# Altium PCB PCB1.pcbdoc
Units mil, origin at the board's own origin, x right, y up, seen from the top; angles counter-clockwise.
Board outline 4569.89 x 4237.55 mil, 2 copper layers (Top Layer, Bottom Layer); 116 components, 63 nets, 379 pads, 56 vias.
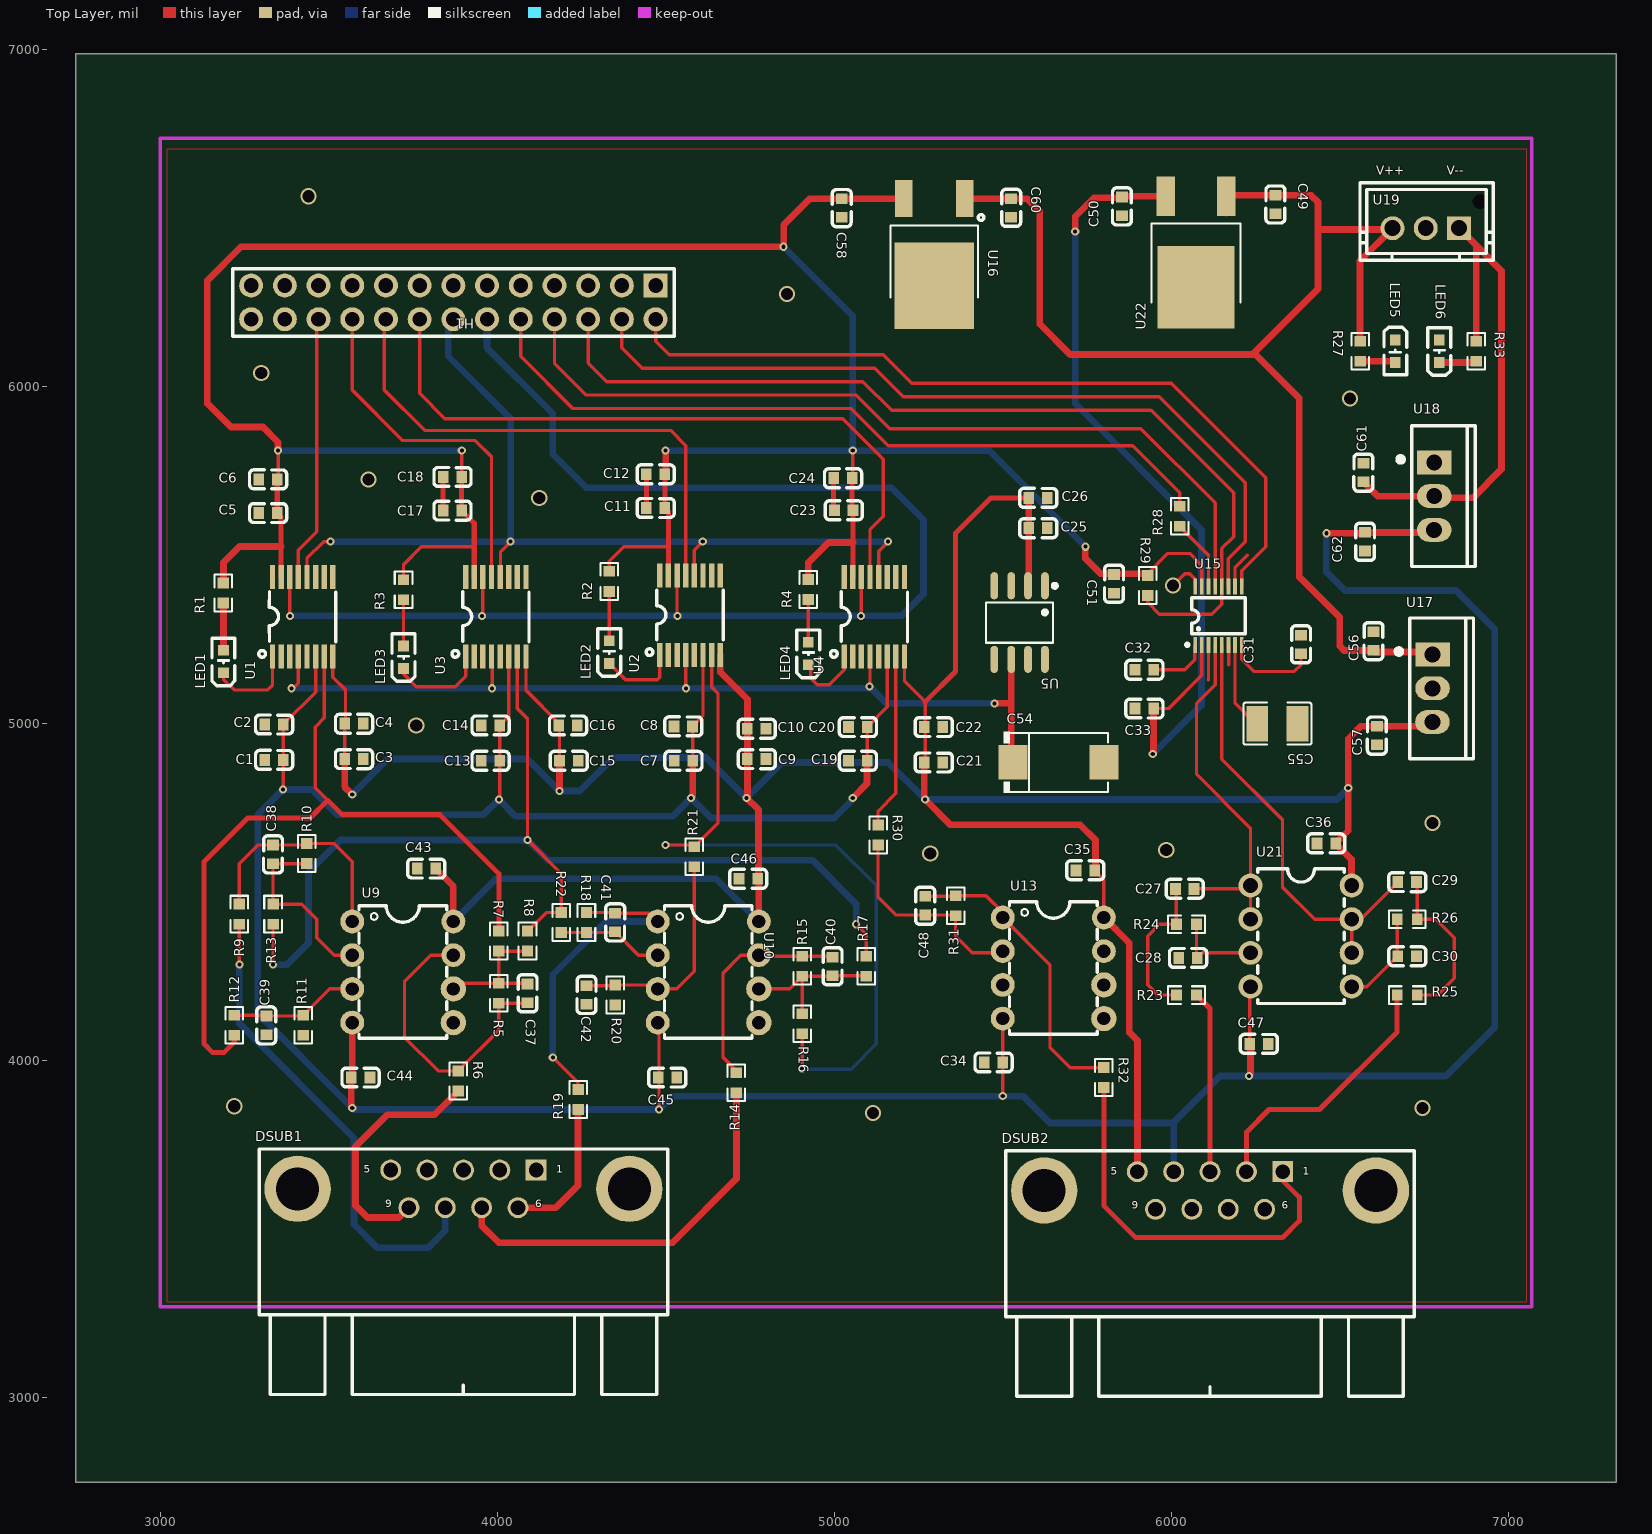
[diagram p0: Top Layer view]
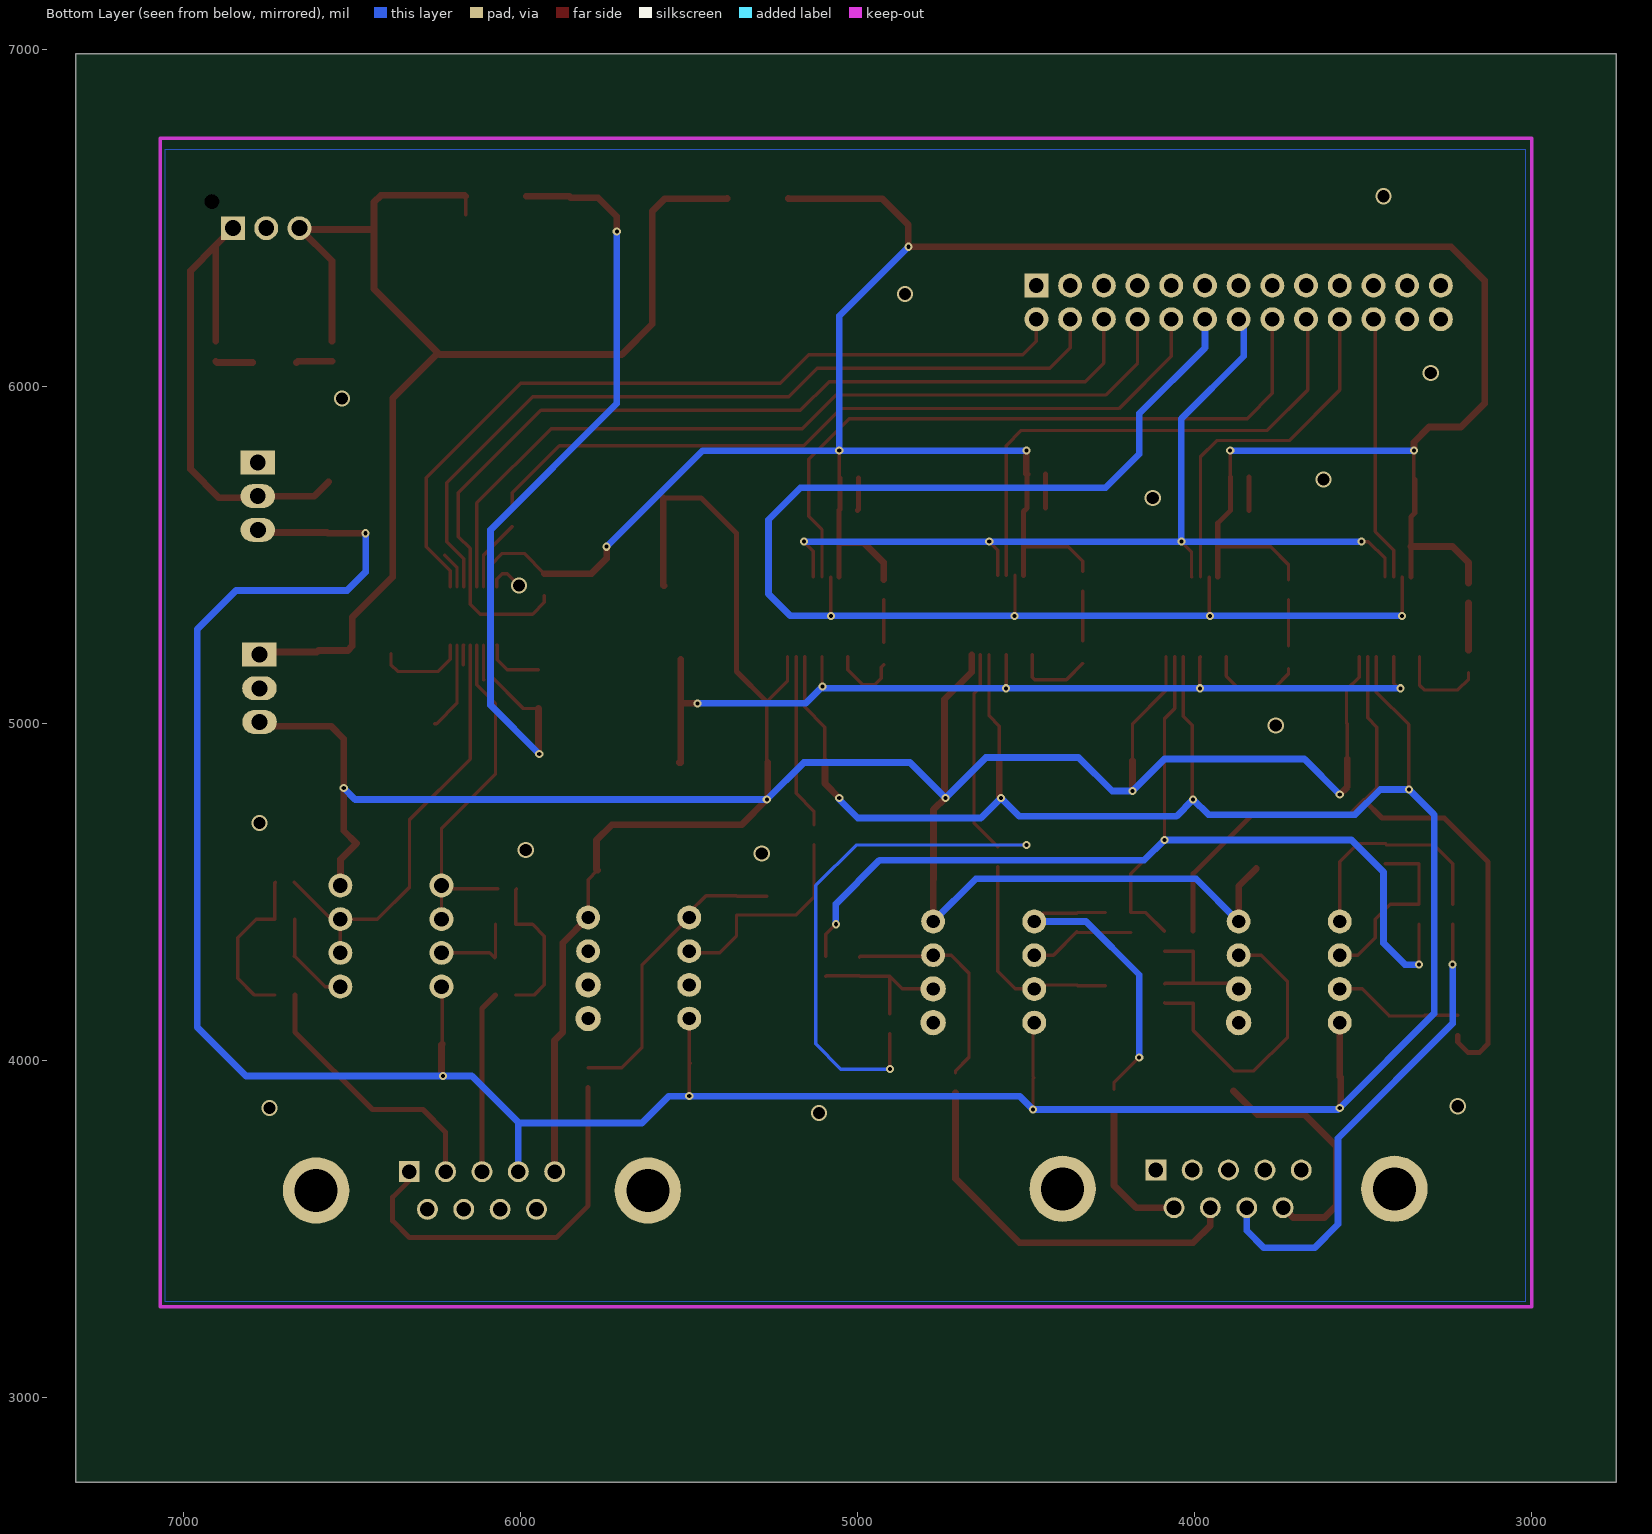
[diagram p1: Bottom Layer view, seen from below]

## Layer stack, top to bottom
Top Layer: signal copper (thickness not stored)
Dielectric: dielectric 12.6, FR-4, Dk 4.8
Bottom Layer: signal copper (thickness not stored)

## Board outline
7319.89,2750 2750,2750 2750,6987.55 7319.89,6987.55

## Components (designator, comment, footprint, x,y, rotation, side; value= is the part's Value field where it differs from the comment)
C1 "CL10B104KA8NNNC" C0603 3337.91,4892.93 r180 top
C2 "GRM188R61E106MA73D" C0603 3337.91,4997.93 r180 top
C3 "CL10B104KA8NNNC" C0603 3575,4895.24 r180 top
C4 "GRM188R61E106MA73D" C0603 3575,5000.24 r180 top
C5 "CL10B104KA8NNNC" C0603 3320,5625.24 r180 top
C6 "GRM188R61E106MA73D" C0603 3320,5725.24 r180 top
C7 "CL10B104KA8NNNC" C0603 4552.44,4890.24 r180 top
C8 "GRM188R61E106MA73D" C0603 4552.14,4992.37 r180 top
C9 "CL10B104KA8NNNC" C0603 4770,4895.24 r180 top
C10 "GRM188R61E106MA73D" C0603 4770,4985.24 r180 top
C11 "CL10B104KA8NNNC" C0603 4470,5640.24 r180 top
C12 "GRM188R61E106MA73D" C0603 4470,5740.24 r180 top
C13 "CL10B104KA8NNNC" C0603 3980,4890.24 r180 top
C14 "GRM188R61E106MA73D" C0603 3980,4995.24 r180 top
C15 "CL10B104KA8NNNC" C0603 4212.44,4890.24 r180 top
C16 "GRM188R61E106MA73D" C0603 4210,4995.24 r180 top
C17 "CL10B104KA8NNNC" C0603 3867.14,5632.37 r180 top
C18 "GRM188R61E106MA73D" C0603 3867.14,5732.37 r180 top
C19 "CL10B104KA8NNNC" C0603 5070,4890.24 r180 top
C20 "GRM188R61E106MA73D" C0603 5070,4990.24 r180 top
C21 "CL10B104KA8NNNC" C0603 5295,4885.24 r180 top
C22 "GRM188R61E106MA73D" C0603 5295,4990.24 r180 top
C23 "CL10B104KA8NNNC" C0603 5028.25,5633.49 r180 top
C24 "GRM188R61E106MA73D" C0603 5025.81,5728.49 r180 top
C25 "GRM188R61E106MA73D" C0603 5605,5580.24 r180 top
C26 "CL10B104KA8NNNC" C0603 5605,5670.24 r180 top
C27 "CL10B104KA8NNNC" C0603 6040,4510.24 r0 top
C28 "CL10B104KA8NNNC" C0603 6050,4305.24 r0 top
C29 "CL10B104KA8NNNC" C0603 6700,4530.24 r180 top
C30 "CL10B104KA8NNNC" C0603 6700,4310.24 r180 top
C31 "CL10B104KA8NNNC" C0603 6385,5235.24 r270 top
C32 "CL10B104KA8NNNC" C0603 5920,5160.24 r180 top
C33 "CL10B104KA8NNNC" C0603 5920,5045.24 r180 top
C34 "CL10B104KA8NNNC" C0603 5472.44,3995.24 r180 top
C35 "CL10B104KA8NNNC" C0603 5745,4565.24 r0 top
C36 "CL10B104KA8NNNC" C0603 6460,4645.24 r0 top
C37 "0603B472K500NT" C0603 4090,4200.24 r270 top
C38 "0603B472K500NT" C0603 3335,4612.68 r90 top
C39 "0603B472K500NT" C0603 3315,4105.24 r90 top
C40 "0603B472K500NT" C0603 4995,4280.24 r270 top
C41 "0603B472K500NT" C0603 4350,4410.24 r270 top
C42 "0603B472K500NT" C0603 4265,4195.24 r270 top
C43 "CL10B104KA8NNNC" C0603 3790,4570.24 r0 top
C44 "CL10B104KA8NNNC" C0603 3595,3950.24 r0 top
C45 "CL10B104KA8NNNC" C0603 4505,3950.24 r0 top
C46 "CL10B104KA8NNNC" C0603 4745,4540.24 r0 top
C47 "CL10B104KA8NNNC" C0603 6260,4050.24 r0 top
C48 "0603B472K500NT" C0603 5270,4460.24 r90 top
C49 "CAP_0603" C0603 6308.7,6540.24 r270 top
C50 "CAP_0603" C0603 5853.7,6535.24 r90 top
C51 "CL10B104KA8NNNC" C0603 5830,5415.24 r270 top
C54 "F931D107MNC" CAP-SMD_L7.3-W4.3-FD 5665,4885.24 r0 top
C55 "={Value}" C1210 6315,5000.24 r0 top
C56 "CAP_0603" C0603 6600,5245.24 r90 top
C57 "CAP_0603" C0603 6610,4965.24 r90 top
C58 "CAP_0603" C0603 5022.4,6530.24 r90 top
C60 "CAP_0603" C0603 5525,6530.24 r270 top
C61 "CAP_0603" C0603 6570,5745.24 r90 top
C62 "CAP_0603" C0603 6575,5540.24 r90 top
DSUB1 "RDED-9SE-LNA(4-40)(55)" DSUB-TH_9P-P2.74-S2.84_L18.5-W30.8-M 3900,3620.24 r0 top
DSUB2 "RDED-9SE-LNA(4-40)(55)" DSUB-TH_9P-P2.74-S2.84_L18.5-W30.8-M 6115,3615.24 r0 top
H1 "10897262" HDR-TH_26P-P2.54-V-M-R2-C13-S2.54 3870,6250.24 r180 top
LED1 "19-217/R6C-AL1M2VY/3T" LED0603-R-RD 3187.91,5184.43 r90 top
LED2 "19-217/R6C-AL1M2VY/3T" LED0603-R-RD 4332.14,5212.37 r90 top
LED3 "19-217/R6C-AL1M2VY/3T" LED0603-R-RD 3722.14,5197.37 r90 top
LED4 "19-217/R6C-AL1M2VY/3T" LED0603-R-RD 4923.25,5208.49 r90 top
LED5 "19-217/R6C-AL1M2VY/3T" LED0603-R-RD 6665,6105.24 r270 top
LED6 "19-217/R6C-AL1M2VY/3T" LED0603-R-RD 6795,6105.24 r90 top
R1 "0603WAF1002T5E" R0603 3187.91,5387.93 r270 top
R2 "0603WAF1002T5E" R0603 4332.14,5422.37 r270 top
R3 "0603WAF1002T5E" R0603 3722.14,5397.37 r270 top
R4 "0603WAF1002T5E" R0603 4923.25,5398.49 r270 top
R5 "ARG03DTC3001" R0603 4005,4200.24 r270 top
R6 "ERJU3RD2200V" R0603 3885,3940.24 r270 top
R7 "ARG03DTC3001" R0603 4005,4355.24 r270 top
R8 "ARG03DTC3001" R0603 4090,4355.24 r270 top
R9 "ERJU3RD2200V" R0603 3235,4435.24 r270 top
R10 "ARG03DTC3001" R0603 3435,4615.24 r90 top
R11 "ARG03DTC3001" R0603 3425,4105.24 r90 top
R12 "ARG03DTC3001" R0603 3220,4105.24 r90 top
R13 "ARG03DTC3001" R0603 3335,4435.24 r90 top
R14 "ERJU3RD2200V" R0603 4710,3935.24 r90 top
R15 "ARG03DTC3001" R0603 4905,4280.24 r270 top
R16 "ARG03DTC3001" R0603 4905,4110.24 r270 top
R17 "ARG03DTC3001" R0603 5095,4280.24 r90 top
R18 "ARG03DTC3001" R0603 4265,4410.24 r270 top
R19 "ERJU3RD2200V" R0603 4240,3885.24 r90 top
R20 "ARG03DTC3001" R0603 4350,4195.24 r270 top
R21 "ARG03DTC3001" R0603 4585,4605.24 r90 top
R22 "ARG03DTC3001" R0603 4190,4410.24 r90 top
R23 "470" R0603 6045,4195.24 r180 top
R24 "470" R0603 6045,4405.24 r0 top
R25 "470" R0603 6700,4195.24 r0 top
R26 "470" R0603 6700,4420.24 r180 top
R27 "0603WAF1002T5E" R0603 6560,6105.24 r270 top
R28 "Res_0603" R0603 6025,5615.58 r90 top
R29 "Res_0603" R0603 5930,5410.24 r90 top
R30 "ARG03DTC3001" R0603 5130,4670.24 r270 top
R31 "ARG03DTC3001" R0603 5360,4460.24 r90 top
R32 "ARG03DTC3001" R0603 5800,3950.24 r270 top
R33 "0603WAF1002T5E" R0603 6905,6105.24 r90 top
U1 "={Manufacturer Part}" TSSOP-16_L5.0-W4.4-P0.65-LS6.4-TL 3422.91,5317.37 r90 top
U2 "={Manufacturer Part}" TSSOP-16_L5.0-W4.4-P0.65-LS6.4-TL 4572.14,5322.37 r90 top
U3 "AD5761RBRUZ" TSSOP-16_L5.0-W4.4-P0.65-LS6.4-TL 3995.98,5317.37 r90 top
U4 "={Manufacturer Part}" TSSOP-16_L5.0-W4.4-P0.65-LS6.4-TL 5119.06,5317.37 r90 top
U5 "={Manufacturer Part}" SOIC-8_L4.9-W3.9-P1.27-LS6.0-BL 5550,5300.24 r180 top
U9 "OPA2227P" PDIP-8_L9.6-W6.4-P2.54-LS7.6-BL 3720,4263.34 r270 top
U10 "OPA2227P" PDIP-8_L9.6-W6.4-P2.54-LS7.6-BL 4626.31,4263.34 r270 top
U13 "OPA2227P" PDIP-8_L9.6-W6.4-P2.54-LS7.6-BL 5650,4275.24 r270 top
U15 "LTC2326HMS-16#PBF" MSOP-16_L4.0-W3.0-P0.50-LS4.9-BL 6140,5320.24 r0 top
U16 "BD733L5FP-CE2" TO-252-3L_L6.6-W6.1-P4.60-LS9.5-BR-CW 5296.7,6429.15 r90 top
U17 "SL7815" TO-220-3_L10.0-W4.5-P2.54-L 6775,5105.24 r270 top
U18 "L7915CV" TO-220-3_L10.0-W4.5-P2.54-L 6780,5675.24 r270 top
U19 "B3B-XH-AM(LF)(SN)" CONN-TH_3P-P2.50_B3B-XH-AM-LF-SN 6755,6470.24 r180 top
U21 "LT1469IN8#PBF" PDIP-8_L10.2-W6.5-P2.54-LS7.6-BL 6385,4370.24 r270 top
U22 "MC7805CDTG" DPAK_L6.6-W6.2-P2.29-LS9.7-BR 6073.5,6430.24 r90 top

## Footprints (in the part's own frame and the unit in brackets; to place one, negate y for a bottom-side part, rotate by r counter-clockwise, add the part's x,y. Pads: shape width x height; smd on the part's side, far side on the other; paste and mask are expansions set on the pad)
C0603 [mm]
  rect 0.8x0.9 smd paste+0 mask+0.051: 1(-0.7,0) 2(0.7,0)
  silkscreen extent -1.41,-0.71 1.39,0.72
C1210 [mm]
  rect 1.635x2.7 smd paste-100 mask+0.051: 1(-1.517,0) 2(1.517,0)
  silkscreen extent -2.56,-1.58 2.56,1.58
CAP-SMD_L7.3-W4.3-FD [mm]
  rect 2.185x2.592 smd paste+0 mask+0.051: 1(-3.437,0) 2(3.437,0)
  silkscreen extent -4.11,-2.3 3.72,2.3
CONN-TH_3P-P2.50_B3B-XH-AM-LF-SN [mm]
  rect 1.8x1.8 hole 1.2 paste+0 mask+0.051: 1(-2.5,0)
  round 1.8 hole 1.2 paste+0 mask+0.051: 2(0,0) 3(2.5,0)
  Multi-Layer board cut-out: -4.65,-2 -4.596,-2.239 -4.443,-2.43 -4.222,-2.536 -3.978,-2.536 -3.757,-2.43 -3.604,-2.239 -3.55,-2 -3.55,-2 -3.604,-1.761 -3.757,-1.57 -3.978,-1.464 -4.222,-1.464 -4.443,-1.57 -4.596,-1.761 -4.65,-2
  silkscreen extent -5.08,-3.43 4.95,2.41
DPAK_L6.6-W6.2-P2.29-LS9.7-BR [mm]
  rect 3x1.4 smd paste+0 mask+0.051: 1(3.424,-2.286) 3(3.424,2.286)
  rect 6.2x5.8 smd paste+0 mask+0.051: 2(-3.424,0)
  silkscreen extent -4.58,-3.35 1.38,3.35
DSUB-TH_9P-P2.74-S2.84_L18.5-W30.8-M [mil]
  round 196.85 hole 127.95 paste+0 mask+2: 0(-492.13,0) 0(492.12,0)
  rect 62x62 hole 43.31 paste+0 mask+2: 1(215.74,55.9)
  round 62 hole 43.31 paste+0 mask+2: 2(107.87,55.92) 3(0.01,55.92) 4(-107.88,55.92) 5(-215.74,55.92) 6(161.82,-55.91) 7(53.93,-55.91) 8(-53.94,-55.91) 9(-161.82,-55.91)
  silkscreen extent -606,-610 606,118
HDR-TH_26P-P2.54-V-M-R2-C13-S2.54 [mm]
  rect 1.8x1.8 hole 1.1 paste+0 mask+0.051: 1(-15.24,-1.27)
  round 1.8 hole 1.1 paste+0 mask+0.051: 2(-15.24,1.27) 3(-12.7,-1.27) 4(-12.7,1.27) 5(-10.16,-1.27) 6(-10.16,1.27) 7(-7.62,-1.27) 8(-7.62,1.27) 9(-5.08,-1.27) 10(-5.08,1.27) 11(-2.54,-1.27) 12(-2.54,1.27) 13(0,-1.27) 14(0,1.27) 15(2.54,-1.27) 16(2.54,1.27) 17(5.08,-1.27) 18(5.08,1.27) 19(7.62,-1.27) 20(7.62,1.27) 21(10.16,-1.27) 22(10.16,1.27) 23(12.7,-1.27) 24(12.7,1.27) 25(15.24,-1.27) 26(15.24,1.27)
  silkscreen extent -16.64,-2.54 16.64,2.54
LED0603-R-RD [mm]
  rect 0.8x0.8 smd paste+0 mask+0.051: 1(0.851,0) 2(-0.851,0)
  silkscreen extent -1.82,-0.86 1.77,0.86
MSOP-16_L4.0-W3.0-P0.50-LS4.9-BL [mil]
  rect 11.02x47.24 smd paste+0 mask+2: 1(-68.9,-86.5) 2(-49.21,-86.5) 3(-29.53,-86.5) 4(-9.84,-86.5) 5(9.84,-86.5) 6(29.53,-86.5) 7(49.21,-86.5) 8(68.9,-86.5) 9(68.9,86.5) 10(49.21,86.5) 11(29.53,86.5) 12(9.84,86.5) 13(-9.84,86.5) 14(-29.53,86.5) 15(-49.21,86.5) 16(-68.9,86.5)
  silkscreen extent -97,-91 79,53
PDIP-8_L9.6-W6.4-P2.54-LS7.6-BL [mm]
  round 1.8 hole 1 paste+0 mask+0.051: 1(-3.81,-3.81) 2(-1.27,-3.81) 3(1.27,-3.81) 4(3.81,-3.81) 7(-1.27,3.81) 8(-3.81,3.81)
  round 1.905 hole 1 paste+0 mask+0.051: 5(3.81,3.81) 6(1.27,3.81)
  silkscreen extent -5,-3.3 5,3.3
PDIP-8_L10.2-W6.5-P2.54-LS7.6-BL [mm]
  round 1.8 hole 1.1 paste+0 mask+0.051: 1(-3.81,-3.81) 2(-1.27,-3.81) 3(1.27,-3.81) 4(3.81,-3.81) 5(3.81,3.81) 6(1.27,3.81) 7(-1.27,3.81) 8(-3.81,3.81)
  silkscreen extent -5.08,-3.25 5.08,3.25
R0603 [mil]
  rect 31.8x34 smd paste-3937.01 mask+2: 1(-29.7,0) 2(29.7,0)
  silkscreen extent -55,-26 55,26
SOIC-8_L4.9-W3.9-P1.27-LS6.0-BL [mm]
  oval 0.588x2.045 smd paste+0 mask+0.051: 1(-1.905,-2.772) 2(-0.635,-2.772) 3(0.635,-2.772) 4(1.905,-2.772) 5(1.905,2.772) 6(0.635,2.772) 7(-0.635,2.772) 8(-1.905,2.772)
  silkscreen extent -2.8,-2.92 2.53,1.52
TO-220-3_L10.0-W4.5-P2.54-L [mm]
  rect 1.8x2.6 hole 1.2 paste+0 mask+0.051: 1(-2.54,0.005)
  oval 1.8x2.6 hole 1.2 paste+0 mask+0.051: 2(0,0.005)
  oval 1.8x2.6 hole 1.2 copper offset 0,0 paste+0 mask+0.051: 3(2.54,-0.005)
  silkscreen extent -5.3,-2.73 5.3,3.09
TO-252-3L_L6.6-W6.1-P4.60-LS9.5-BR-CW [mm]
  rect 2.8x1.3 smd paste+0 mask+0.051: 1(3.292,-2.3) 3(3.292,2.3)
  rect 6.5x6 smd paste+0 mask+0.051: 2(-3.292,0)
  silkscreen extent -4.17,-3.74 2.06,3.3
TSSOP-16_L5.0-W4.4-P0.65-LS6.4-TL [mil]
  rect 71x16 smd paste+0 mask+2: 1(-118.11,89.57) 2(-118.11,63.97) 3(-118.11,38.38) 4(-118.11,12.79) 5(-118.11,-12.8) 6(-118.11,-38.39) 7(-118.11,-63.98) 8(-118.11,-89.57) 9(118.11,-89.57) 10(118.11,-63.98) 11(118.11,-38.39) 12(118.11,-12.8) 13(118.11,12.79) 14(118.11,38.38) 15(118.11,63.97) 16(118.11,89.57)
  silkscreen extent -120,-98 74,130

## Via types
v1: diameter 24, hole 12, Top Layer to Bottom Layer, 27 vias
v2: diameter 24.02, hole 12.01, Top Layer to Bottom Layer, 15 vias
v3: diameter 48, hole 36, Top Layer to Bottom Layer, 14 vias

## Nets (pads, with @x,y where several pads share a name; then routed paths per layer and width w, separated by ;. In a path a pad name is that pad's centre, name@x,y a point inside that pad or via, vN(x,y) a via of type N, cw(c..) or ccw(c..) an arc to the next point about the centre after c; other vN are vias at no path point)
3.3V: C5.1 C6.1 C11.1 C12.1 C17.1 C18.1 C23.1 C24.1 C51.1 C58.2 R1.1 R2.1 R3.1 R4.1 R29.2 U1.15 U2.15 U3.15 U4.15 U15.15 U16.3 | length 8441.1
  Top Layer w10: C6.1 3350,5727.68 v1(3350,5810.24) ; R3.1 3722.14,5472.37 3775,5525.24 3931.66,5525.24 3931.98,5524.91 ; C18.1 3895,5732.68 v1(3895,5810.24) ; R2.1 4332.14,5482.37 4375,5525.24 4507.24,5525.24 4508.14,5526.14 ; C24.1 5055,5730.12 v1(5055,5810.24) ; R29.2 5930,5445.24 5990,5505.24 6055,5505.24 6090.79,5469.45 U15.15
  Top Layer w15: C6.1 C5.1 3358.91,5613.89 3358.91,5526.12 U1.15 ; C18.1 C17.1 3931.98,5595.09 3931.98,5524.91 U3.15 ; C12.1 C11.1 4508.14,5629.66 4508.14,5526.14 U2.15@4508.14,5440.47 ; C24.1 5053.37,5635.93 C23.1 5055.81,5537.94 5055.81,5436.22 U4.15
  Top Layer w20: R1.1 3187.91,5478.14 3235.88,5526.12 3358.91,5526.12 ; v1(3350,5810.24) 3350,5835.24 3305,5880.24 3210,5880.24 3140,5950.24 3140,6315.24 3240,6415.24 v1(4850,6415.24) 4850,6480.24 4927.56,6557.8 C58.2 5205.19,6557.8 U16.3 ; C12.1 4500,5742.68 v1(4500,5810.24) ; R4.1 4923.25,5478.49 4982.7,5537.94 5055.81,5537.94 ; v1(5745,5525.24) 5745,5490.24 5790,5445.24 R29.2@5930,5445.24
  Bottom Layer w20: v1(3350,5810.24) v1(3895,5810.24) ; v1(4500,5810.24) v1(5055,5810.24) ; v1(4850,6415.24) 5055,6210.24 v1(5055,5810.24) ; v1(5745,5525.24) 5460,5810.24 v1(5055,5810.24)
5V: C33.1 C50.2 U15.2 U22.3 | length 2514.1
  Top Layer w10: C33.1 5992.56,5045.24 6090.79,5143.47 U15.2
  Top Layer w20: v1(5715,6460.24) 5715,6505.24 5770,6560.24 5851.14,6560.24 C50.2 5856.14,6565.24 5983.32,6565.24 U22.3 ; v1(5945,4910.24) 5947.56,4912.8 C33.1
  Bottom Layer w20: v1(5715,6460.24) 5715,5950.24 6090,5575.24 6090,5055.24 v1(5945,4910.24)
$1N8441: LED2.2 U2.1 | length 240.2
  Top Layer w10: LED2.2 4380.77,5130.24 4475,5130.24 4482.54,5137.77 U2.1@4482.54,5204.27
$1N8442: LED2.1 R2.2 | length 146.8
  Top Layer w10: LED2.1 R2.2
$1N8455: LED1.2 U1.1 | length 268.5
  Top Layer w10: LED1.2 3187.91,5132.33 3220,5100.24 3320,5100.24 3333.31,5113.54 U1.1
$1N8456: LED1.1 R1.2 | length 140.3
  Top Layer w20: LED1.1 R1.2
$1N8468: LED4.2 U4.1 | length 208.3
  Top Layer w10: LED4.2 4930,5168.24 4930,5135.24 4950,5115.24 4985,5115.24 5029.46,5159.7 U4.1
$1N8469: LED4.1 R4.2 | length 126.8
  Top Layer w10: LED4.1 R4.2
$1N8482: LED3.2 U3.1 | length 286.4
  Top Layer w10: LED3.2 3722.14,5148.1 3760,5110.24 3875,5110.24 3906.38,5141.62 U3.1
$1N8483: LED3.1 R3.2 | length 136.8
  Top Layer w10: LED3.1 R3.2
$1N8501: C37.2 R5.2 R6.1 U9.7 | length 880.1
  Top Layer w10: U9.7 3803.1,4313.34 3725,4235.24 3725,4070.24 3825.3,3969.94 R6.1 4005,4089.94 R5.2 4087.86,4170.54 C37.2
$1N8502: C37.1 R5.1 R7.2 R8.2 U9.6 | length 408.6
  Top Layer w10: U9.6 3886.9,4230.24 4004.7,4230.24 R5.1 ; C37.1 4087.86,4229.94 R5.1 ; R8.2 R7.2 R5.1
$1N8511: C40.1 R14.2 R15.1 U10.7 | length 661.2
  Top Layer w10: R14.2 4710,3970.54 4670,4010.54 4670,4260.24 4723.1,4313.34 U10.7 4779.71,4309.94 R15.1 4992.86,4309.94 C40.1
$1N8512: C40.2 R15.2 R16.1 R17.1 U10.6 | length 446.5
  Top Layer w10: U10.6 4867.8,4213.34 R15.2 ; R16.1 R15.2 ; R17.1 5092.86,4252.68 C40.2 4992.86,4250.54 R15.2
$1N8517: C41.1 R18.1 R19.2 U10.1 | length 970.5
  Top Layer w10: v2(4165,4010.24) 4240,3935.24 R19.2 ; R18.1 4347.86,4439.94 C41.1 4451.85,4437.8 U10.1
  Bottom Layer w20: v2(4165,4010.24) 4165,4255.24 4323.1,4413.34 U10.1
$1N8518: C41.2 R18.2 R22.1 U10.2 | length 317.2
  Top Layer w10: R22.1 R18.2 4350,4380.54 C41.2 4419.34,4313.34 U10.2
$1N8520: C42.1 R20.1 R21.1 U10.3 | length 657.5
  Top Layer w10: C42.1 4347.86,4222.8 R20.1 4464.71,4224.94 U10.3 4533.1,4213.34 4585,4265.24 R21.1
$1N8548: C38.1 R10.1 R13.2 U9.2 | length 550.4
  Top Layer w10: R10.1 3434.58,4585.12 C38.1 R13.2 3420.3,4464.94 3465,4420.24 3465,4365.24 3516.9,4313.34 U9.2
$1N8549: C38.2 R9.1 R10.2 U9.1 | length 679.6
  Top Layer w10: R9.1 3235,4585.24 3290,4640.24 C38.2 3430.3,4640.24 R10.2 3515.3,4644.94 3570,4590.24 U9.1
$1N8550: C39.2 R11.2 R12.2 U9.3 | length 389.9
  Top Layer w10: R12.2 3318.54,4134.94 C39.2@3320.68,4132.8 ; C39.2 C39.2@3320.68,4132.8 ; U9.3 3503.4,4213.34 R11.2 3422.86,4132.8 C39.2@3320.68,4132.8
$1N30800: C48.1 R30.2 R31.1 U13.2 | length 631
  Top Layer w10: R30.2 5130,4485.24 5182.56,4432.68 C48.1 5357.86,4432.68 R31.1 5360,4370.24 5410,4320.24 5495,4320.24 U13.2
$1N31013: C48.2 R31.2 R32.1 U13.1 | length 894.4
  Top Layer w10: C48.2 5357.86,4487.8 R31.2 5450.3,4489.94 5500,4440.24 U13.1 5640,4285.24 5640,4040.24 5700.3,3979.94 R32.1
$2N10171: C27.1 R23.2 R24.1 | length 448.7
  Top Layer w10: C27.1 6015.3,4507.38 R24.1 5965,4405.24 5930,4370.24 5930,4225.24 5960,4195.24 R23.2
$2N10177: C27.2 U15.4 U21.1 U21.2 | length 1074.2
  Top Layer w10: C27.2 6225,4510.24 U21.1 ; U15.4 6130.16,5115.4 6075,5060.24 6075,4850.24 6235,4690.24 U21.1 ; U21.2 U21.1
$2N10196: C28.2 R24.2 U21.3 | length 264.8
  Top Layer w10: R24.2 6074.7,4308.1 C28.2 6092.56,4320.24 U21.3
$2N10488: C29.1 R25.2 R26.1 | length 495
  Top Layer w10: C29.1 6729.7,4528.1 R26.1 6785,4420.24 6840,4365.24 6840,4245.24 6790,4195.24 R25.2
$2N10490: C30.2 R26.2 U21.5 | length 285.4
  Top Layer w10: U21.5 6580,4220.24 6670.3,4310.54 C30.2@6670.3,4312.38 ; R26.2 C30.2@6670.3,4312.38 ; C30.2 C30.2@6670.3,4312.38
$2N12917: C55.1 U15.7 | length 264.1
  Top Layer w10: U15.7 6189.21,5060.77 6249.74,5000.24 C55.1
$2N12918: C31.2 U15.8 | length 274.2
  Top Layer w10: U15.8 6208.9,5191.34 6245,5155.24 6365,5155.24 6385,5175.24 C31.2
$2N13335: C29.2 U15.5 U21.6 U21.7 | length 1320.5
  Top Layer w10: U15.5 6149.84,4895.4 6330,4715.24 6330,4515.24 6425,4420.24 U21.7 ; U21.6 U21.7 ; C29.2 6562.44,4420.24 U21.7
$2N14080: C32.1 U15.1 | length 178.8
  Top Layer w10: C32.1 6040,5160.24 6070,5190.24 6070,5232.64 U15.1
$2N15362: R28.1 U15.14 | length 213.9
  Top Layer w10: R28.1@6025,5585.24 6110.47,5499.77 U15.14
$3N8511: LED5.1 R27.2 | length 106.6
  Top Layer w20: R27.2 6661.2,6075.54 LED5.1
$3N8729: LED6.2 R33.1 | length 111.6
  Top Layer w20: LED6.2 6901.2,6071.74 R33.1
+15V: C3.2 C4.2 C9.2 C10.2 C15.2 C16.2 C21.2 C22.2 C25.2 C26.2 C35.2 C36.2 C43.2 C46.2 C57.2 DSUB2.5 U1.8 U2.8 U3.8 U4.8 U5.2 U9.8 U10.8 U13.8 U17.3 U21.8 | length 9979.4
  Top Layer w10: U1.8 3512.51,5137.73 3550,5100.24 3550,5002.8 C4.2 C3.2 ; U3.8 4085.58,5099.65 4184.88,5000.36 C15.2 ; U4.8@5208.66,5199.27 5208.66,5126.58 5270,5065.24 5270,4887.8 C21.2 ; C35.2 5800,4537.8 U13.8
  Top Layer w15: 5270,5065.24 5360,5155.24 5360,5565.24 5465,5670.24 C26.2
  Top Layer w20: C3.2 3547.44,4812.8 v1(3570,4790.24) ; C43.2 3870,4517.8 U9.8 ; C15.2 4184.88,4800.36 v1(4185,4800.24) ; U2.8 4661.74,5153.5 4742.44,5072.8 C10.2 C9.2 4742.44,4782.68 v1(4740,4780.24) 4775,4745.24 4775,4537.8 4776.31,4536.48 U10.8 ; v1@5267.44,4777.8 C21.2 ; v1(5270,4775.24) 5345,4700.24 5730,4700.24 5775,4655.24 5775,4567.68 C35.2 ; U5.2@5575,5409.34 5577.44,5411.78 C25.2 C26.2 ; U13.8 5875,4350.24 5875,4085.24 5900,4060.24 5900,3671.89 DSUB2.5@5899.25,3671.15 ; U21.8 6535,4597.8 C36.2 6525,4682.68 v1(6525,4809.14) 6525,4955.24 6562.56,4992.8 C57.2 6762.37,4992.8 U17.3
  Bottom Layer w20: v1(3570,4790.24) 3675,4895.24 4090,4895.24 v1(4185,4800.24) 4245,4800.24 4345,4900.24 4620,4900.24 v1(4740,4780.24) 4845,4885.24 5160,4885.24 v1(5270,4775.24) 6491.1,4775.24 v1(6525,4809.14) ; U9.8 3996.9,4540.24 4649.41,4540.24 U10.8
-15V: C1.1 C2.1 C7.1 C8.1 C13.1 C14.1 C19.1 C20.1 C34.1 C44.1 C45.1 C47.1 C62.2 DSUB2.4 U1.6 U2.6 U3.6 U4.6 U9.4 U10.4 U13.4 U18.3 U21.4 | length 11614
  Top Layer w10: v1(3365,4805.24) 3365,4892.46 C1.1 C2.1 3461.31,5093.77 U1.6 ; v1(4005,4775.24) 4007.56,4777.8 C13.1 C14.1 4034.38,5022.06 U3.6 ; U10.4 4480,4109.65 4480,3952.8 C45.1 4480,3947.68 v1(4480,3855.24) ; C7.1 4580,4992.07 C8.1 4610.54,5023.21 U2.6 ; C19.1 C20.1 5157.46,5050.14 U4.6 ; C34.1@5497.44,3992.68 C34.1 ; v1(5500,3895.24) C34.1 ; U13.4 C34.1 ; C47.1 6232.44,4217.68 U21.4
  Top Layer w20: v1(3570,3860.24) 3567.44,3862.8 C44.1 3570,3952.8 U9.4 ; v1(4575,4780.24) 4580,4785.24 C7.1 ; v1(5055,4780.24) 5097.56,4822.8 C19.1 ; v1(6230,3955.24) 6235,3960.24 6235,4047.68 C47.1 ; v1(6460,5565.24) 6572.44,5565.24 C62.2 6772.37,5567.8 U18.3
  Bottom Layer w20: v1(5055,4780.24) 5055,4775.24 5000,4720.24 4635,4720.24 v1(4575,4780.24) 4520,4725.24 4055,4725.24 v1(4005,4775.24) 3960,4730.24 3525,4730.24 3450,4805.24 v1(3365,4805.24) 3290,4730.24 3290,4140.24 v1(3570,3860.24) 3575,3855.24 v1(4480,3855.24) 4520,3895.24 v1(5500,3895.24) 5560,3895.24 5640,3815.24 6004.25,3815.24 6007.12,3812.36 ; DSUB2.4@6007.12,3671.15 6007.12,3812.36 ; v1(6460,5565.24) 6460,5450.24 6515,5395.24 6845,5395.24 6960,5280.24 6960,4100.24 6815,3955.24 v1(6230,3955.24) 6145,3955.24 6007.12,3817.36 6007.12,3812.36
ADC_BUSY: H1.4 U15.11 | length 2430.1
  Top Layer w10: H1.4 4370,6115.24 4430,6055.24 5120,6055.24 5205,5970.24 5965,5970.24 6220,5715.24 6220,5540.24 6169.53,5489.77 U15.11
ADC_CNV: H1.2 U15.9 | length 2395.7
  Top Layer w10: H1.2 4470,6135.24 4510,6095.24 5145,6095.24 5230,6010.24 6000,6010.24 6280,5730.24 6280,5525.24 6208.9,5454.14 U15.9
ADC_SCK: H1.8 U15.13 | length 2510.5
  Top Layer w10: H1.8 4170,6070.24 4265,5975.24 5065,5975.24 5165,5875.24 5910,5875.24 6130.16,5655.08 U15.13
ADC_SDI: H1.6 R29.1 U15.12 | length 2816.2
  Top Layer w10: H1.6 4270,6070.24 4325,6015.24 5085,6015.24 5170,5930.24 5940,5930.24 6185,5685.24 6185,5555.24 6149.84,5520.08 U15.12 6149.84,5355.08 6120,5325.24 5965,5325.24 5930,5360.24 R29.1@5930,5380.58
ADC_SDO: H1.10 R28.2 | length 2272.8
  Top Layer w10: H1.10 4070,6090.24 4225,5935.24 5050,5935.24 5160,5825.24 5885,5825.24 6025,5685.24 R28.2@6025,5645.24
AGND: C1.2 C2.2 C3.1 C4.1 C5.2 C6.2 C7.2 C8.2 C9.1 C10.1 C11.2 C12.2 C13.2 C14.2 C15.1 C16.1 C17.2 C18.2 C19.2 C20.2 C21.1 C22.1 C23.2 C24.2 C25.1 C26.1 C28.1 C30.1 C31.1 C32.2 C33.2 C34.2 C35.1 C36.1 C39.1 C42.2 C43.1 C44.2 C45.2 C46.1 C47.2 C49.2 C50.1 C51.2 C54.2 C55.2 C56.2 C57.1 C58.1 C60.2 C61.2 C62.1 DSUB1.1 DSUB1.2 DSUB1.3 DSUB1.4 DSUB1.5 DSUB2.6 DSUB2.7 DSUB2.8 DSUB2.9 H1.1 H1.3 H1.5 H1.7 H1.9 H1.11 H1.13 H1.15 H1.17 H1.19 H1.21 H1.23 H1.25 LED5.2 LED6.1 R11.1 R20.2 U1.5 U1.16 U2.5 U2.16 U3.5 U3.16 U4.5 U4.16 U5.4 U9.5 U10.5 U13.3 U15.3 U15.6 U15.10 U15.16 U16.2 U17.2 U18.1 U19.2 U22.2 | length 676.4
  Top Layer w10: v3(6005,5410.24) 6040,5445.24 6055,5445.24 6071.1,5429.14 U15.16 ; 6110,5130.24 6110.47,5130.71 U15.3 ; U15.6 6170,5233.27 6170,5175.24 ; U15.10 6189.21,5464.45 6225,5500.24
  Top Layer w15: C17.2 C18.2 ; C11.2 C12.2 ; C24.2 4998.25,5635.93 C23.2
  other v3: 5115,3845.24 6745,3860.24 3220,3865.24 5285,4615.24 5985,4625.24 6775,4705.24 3760,4995.24 4125,5670.24 3618.4,5725.13 6530,5965.24 3300,6040.24 4860,6275.24 3440,6565.24
BIAS: DSUB2.1 R32.2 | length 1156.7
  Top Layer w15: R32.2 5800,3570.24 5895,3475.24 6330,3475.24 6380,3525.24 6380,3595.24 6330.74,3644.49 DSUB2.1
PREAMP+: DSUB2.3 R23.1 | length 541
  Top Layer w15: R23.1 6075,4195.24 6115,4155.24 DSUB2.3
PREAMP-: DSUB2.2 R25.1 | length 797.3
  Top Layer w15: DSUB2.2@6222.87,3671.15 6222.87,3788.11 6290,3855.24 6440,3855.24 6670.3,4085.54 R25.1
SAMPLE: R30.1 U4.7 | length 521.3
  Top Layer w10: R30.1 5130,4740.24 5183.06,4793.3 U4.7@5183.06,5199.27
SCLK: H1.12 U1.14 U2.14 U3.14 U4.14 | length 4256.5
  Top Layer w10: U1.14 3385,5434.98 v2(3385,5320.24) ; v2(3955,5320.24) 3957.58,5322.82 U3.14 ; U2.14@4533.74,5440.47 4533.74,5321.5 v2(4535,5320.24) ; v2(5080,5320.24) 5080.66,5320.9 U4.14
  Bottom Layer w20: v2(3385,5320.24) v2(3955,5320.24) v2(4535,5320.24) v2(5080,5320.24) 5200,5320.24 5265,5385.24 5265,5605.24 5170,5700.24 4265,5700.24 4165,5800.24 4165,5920.24 3970,6115.24 H1.12
SDI: H1.14 U1.12 U2.12 U3.12 U4.12 | length 2887.3
  Top Layer w10: U1.12 3435.71,5490.94 3485,5540.24 v1(3505,5540.24) ; U3.12 4010,5436.69 4010,5510.24 v1(4040,5540.24) ; U2.12 4584.94,5515.17 v1(4610,5540.24) ; U4.12 5131.86,5512.1 v1(5160,5540.24)
  Bottom Layer w20: v1(3505,5540.24) v1(4040,5540.24) ; H1.14 3855,6185.24 3855,6090.24 4040,5905.24 v1(4040,5540.24) ; v1(5160,5540.24) v1(4610,5540.24) v1(4040,5540.24)
SYNC1: H1.22 U1.13 | length 789.6
  Top Layer w10: U1.13 3410.11,5515.34 3465,5570.24 3465,6195.24 H1.22
SYNC2: H1.18 U2.13 | length 1560.5
  Top Layer w10: H1.18 3665,6195.24 3665,5990.24 3785,5870.24 4515,5870.24 4560,5825.24 4560,5441.14 U2.13
SYNC3: H1.20 U3.13 | length 1061.9
  Top Layer w10: H1.20 3570,5990.24 3720,5840.24 3935,5840.24 3983.18,5792.05 U3.13
SYNC4: H1.16 U4.13 | length 2041.6
  Top Layer w10: H1.16 3770,5980.24 3845,5905.24 5025,5905.24 5145,5785.24 5145,5615.24 5106.26,5576.5 U4.13
V++: C49.1 C56.1 C60.1 R27.1 U16.1 U17.1 U19.3 U22.1 | length 3961.3
  Top Layer w10: U22.1@6163.51,6510.04 U22.1@6163.51,6561.73
  Top Layer w20: U16.1 5388.22,6557.8 C60.1 5572.44,6557.8 5610,6520.24 5610,6185.24 5700,6095.24 6240,6095.24 6245,6100.24 ; U22.1 6166.26,6567.8 C49.1 6415,6567.8 6435,6547.8 6435,6466.59 ; R27.1 6560,6373.66 U19.3@6652.93,6466.59 ; U19.3 U19.3@6652.93,6466.59 ; U17.1 6767.76,5212.68 6605,5212.68 C56.1 6512.56,5217.68 6500,5230.24 6500,5315.24 6380,5435.24 6380,5965.24 6245,6100.24 ; 6245,6100.24 6435,6290.24 6435,6466.59 ; 6435,6466.59 U19.3@6652.93,6466.59
V--: C61.1 R33.2 U18.2 U19.1 | length 1516
  Top Layer w20: C61.1 6612.44,5675.24 U18.2 6785.2,5670.24 6895,5670.24 6980,5755.24 6980,6343.66 6905,6418.66 ; U19.1 6905,6418.66 ; R33.2 6905,6418.66
VREF1: C54.1 U1.4 U2.4 U3.4 U4.4 U5.6 | length 2857.2
  Top Layer w10: v2(3390,5105.24) 3395.21,5105.24 3410.11,5120.13 U1.4 ; U3.4 3985,5197.46 v2(3985,5105.24) ; U2.4 4560,5203.61 v2(4560,5105.24) ; v2(5105,5110.24) 5106.26,5111.5 U4.4
  Top Layer w20: v2(5475,5060.55) 5524.98,5060.55 ; U5.6@5525,5191.04 5525,5060.57 ; C54.1 5525,4885.24 5525,5060.57
  Bottom Layer w20: v2(3390,5105.24) v2(3985,5105.24) v2(4560,5105.24) 5100,5105.24 v2(5105,5110.24) 5154.68,5060.55 v2(5475,5060.55)
XOUT: R7.1 R12.1 U1.7 | length 2337.3
  Top Layer w10: U1.7 3486.91,5017.14 3460,4990.24 3460,4810.24 3497.5,4772.74
  Top Layer w15: R12.1 3220,4055.24 3190,4025.24 3155,4025.24 3130,4050.24 3130,4590.24 3260,4720.24 3445,4720.24 3497.5,4772.74 3540,4730.24 3830,4730.24 4005,4555.24 R7.1
YOUT: R16.2 R21.2 U2.7 | length 2194.4
  Top Layer w10: v2(4500,4640.24) 4579.7,4640.24 R21.2 4655,4704.94 4655,5090.24 4636.14,5109.1 U2.7 ; v2(4905,3975.24) R16.2
  Bottom Layer w10: v2(4500,4640.24) 5005,4640.24 5125,4520.24 5125,4050.24 5050,3975.24 v2(4905,3975.24)
Z+X: DSUB1.9 R6.2 | length 733.2
  Top Layer w20: DSUB1.9 3709.09,3535.24 3615,3535.24 3580,3570.24 3580,3745.24 3675,3840.24 3814.7,3840.24 R6.2
Z+Y: DSUB1.7 R14.1 | length 1164.2
  Top Layer w20: DSUB1.7 3953.93,3511.3 4005,3460.24 4520,3460.24 4710,3650.24 R14.1
Z-X: DSUB1.8 R9.2 | length 1420.4
  Top Layer w10: v2(3235,4285.24) R9.2
  Bottom Layer w20: v2(3235,4285.24) 3235,4110.24 3575,3770.24 3575,3515.24 3645,3445.24 3795,3445.24 3846.06,3496.3 DSUB1.8
Z-Y: DSUB1.6 R19.1 | length 430.8
  Top Layer w20: DSUB1.6 4174.09,3564.33 4240,3630.24 R19.1
ZOUT: R8.1 R13.1 R17.2 R22.2 U3.7 | length 3309.7
  Top Layer w10: v2(3335,4285.24) R13.1 ; U3.7 4059.98,5045.25 4090,5015.24 v1(4090,4655.24) 4190,4555.24 R22.2 4145,4439.94 R8.1 ; v2(5065,4405.24) 5095,4375.24 R17.2
  Bottom Layer w20: v2(3335,4285.24) 3376.23,4285.24 3440,4349 3440,4560.24 3535,4655.24 v1(4090,4655.24) 4150,4595.24 4935,4595.24 5065,4465.24 v2(5065,4405.24)
"": DSUB1.0 DSUB2.0 H1.24 H1.26 U1.2 U1.3 U1.9 U1.10 U1.11 U2.2 U2.3 U2.9 U2.10 U2.11 U3.2 U3.3 U3.9 U3.10 U3.11 U4.2 U4.3 U4.9 U4.10 U4.11 U5.1 U5.3 U5.5 U5.7 U5.8 U13.5 U13.6 U13.7

## Polygon pours and split planes (outlines as drawn)
AGND on Top Layer (solid, remove dead copper, pour order 0): 3020,3285.24 7055,3285.24 7055,6705.24 3020,6705.24
AGND on Bottom Layer (solid, remove dead copper, pour order 1): 3020,3285.24 7055,3285.24 7055,6705.24 3020,6705.24

## Keep-outs
Board Outline Layer:
  lines w10 net "": 3000,3270 3000,6737.55 7069.89,6737.55 7069.89,3270 3000,3270

## Silkscreen, mask and mechanical layers (free items; w line width, h text height)
Top Silkscreen Layer:
  text "V++" at 6607.78,6629.12 h25.96
  text "V--" at 6817.78,6629.12 h25.96

## Text inside footprints (layer, text, board x,y; h text height)
DSUB1: Top Silkscreen Layer "5" at 3604.72,3667.29 h22.88; Top Silkscreen Layer "1" at 4175.59,3667.29 h22.88; Top Silkscreen Layer "9" at 3667.71,3566.08 h22.88; Top Silkscreen Layer "6" at 4112.59,3566.08 h22.88
DSUB2: Top Silkscreen Layer "5" at 5819.72,3662.29 h22.88; Top Silkscreen Layer "1" at 6390.59,3662.29 h22.88; Top Silkscreen Layer "9" at 5882.71,3561.08 h22.88; Top Silkscreen Layer "6" at 6327.59,3561.08 h22.88